# EAGLE board untitled (EAGLE 9.6.0)

Size 100 x 80 mm. Coordinates in mm from the lower left corner, seen from the top.
Outline: 0,0 100,0 100,80 0,80 0,0
Copper layers (1*16): Top 0.035mm / dielectric 1.5mm / Bottom 0.035mm
Design rules "default": minimum track width 6mil, minimum drill 0.35mm, track to track 6mil, track to pad 6mil, pad to pad 6mil, via to via 6mil, smd to smd 6mil, copper to edge 40mil, drill to drill 6mil, minimum pad ring 10mil, minimum via ring 8mil, stop-mask expansion 4mil, vias tented up to drill 0mil, thermal gap 10mil

## Footprints (pad centres in the part's own frame; a part is rotated, then mirrored left to right if it is on the bottom)
MA04-1 = drill 1.016 long: 1 -3.81,0; 2 -1.27,0; 3 1.27,0; 4 3.81,0
LOLIN32LITE = drill 0.8 pad 1.676 long: P$1 -13.97,15.24; P$2 -13.97,12.7; P$3 -13.97,10.16; P$4 -13.97,7.62; P$5 -13.97,5.08; P$6 -13.97,2.54; P$7 -13.97,0; P$9 -13.97,-5.08; P$10 -13.97,-7.62; P$11 -13.97,-10.16; P$12 -13.97,-12.7; P$13 -13.97,-15.24; P$14 11.43,-15.24; P$15 11.43,-12.7; P$16 11.43,-10.16; P$17 11.43,-7.62; P$18 11.43,-5.08; P$19 11.43,-2.54; P$20 11.43,0; P$21 11.43,2.54; P$22 11.43,5.08; P$23 11.43,7.62; P$24 11.43,10.16; P$25 11.43,12.7; P$26 11.43,15.24 | drill 0.6 pad 1.676 long: P$8 -13.97,-2.54

## Placement (x,y rotation side)
SV1  [MA04-1]  16.51,3.81 180 top
SV2  [MA04-1]  16.51,31.75 180 top
U$1  LOLIN  [LOLIN32LITE]  17.78,17.78 0 top

## Library data of the parts
SV1 SV2 = con-lstb; OC_FARNELL: unknown; OC_NEWARK: unknown
U$1 = esp32

## Nets
N$1: SV1.1 SV2.1 U$1.P$13

## Tracks (layer width: path | path; a pad name or v marks a point on that pad's centre or on a via)
N$1  (2 unrouted)